# Altium PCB Key_Input.PcbDoc
Units mil, origin at the board's own origin, x right, y up, seen from the top; angles counter-clockwise.
Board outline 3090 x 2000 mil, 2 copper layers (Top Layer, Bottom Layer); 20 components, 24 nets, 77 pads, 0 vias.
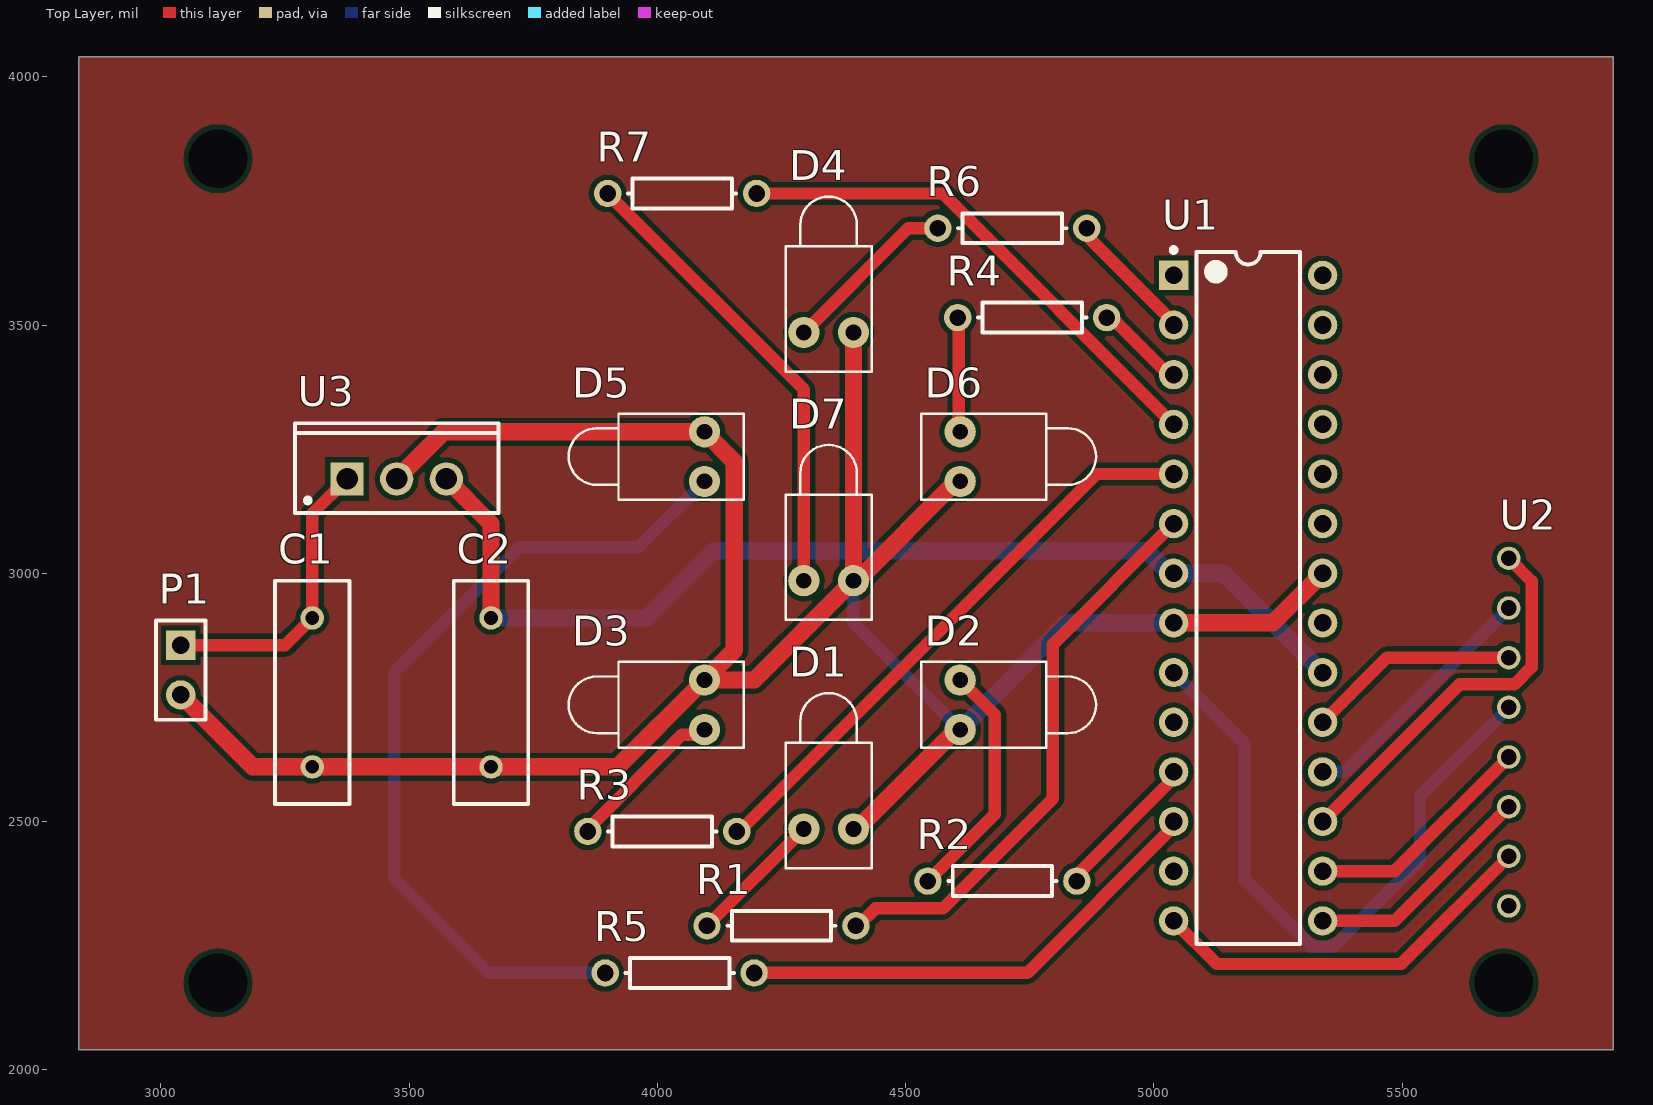
[diagram p0: Top Layer view]
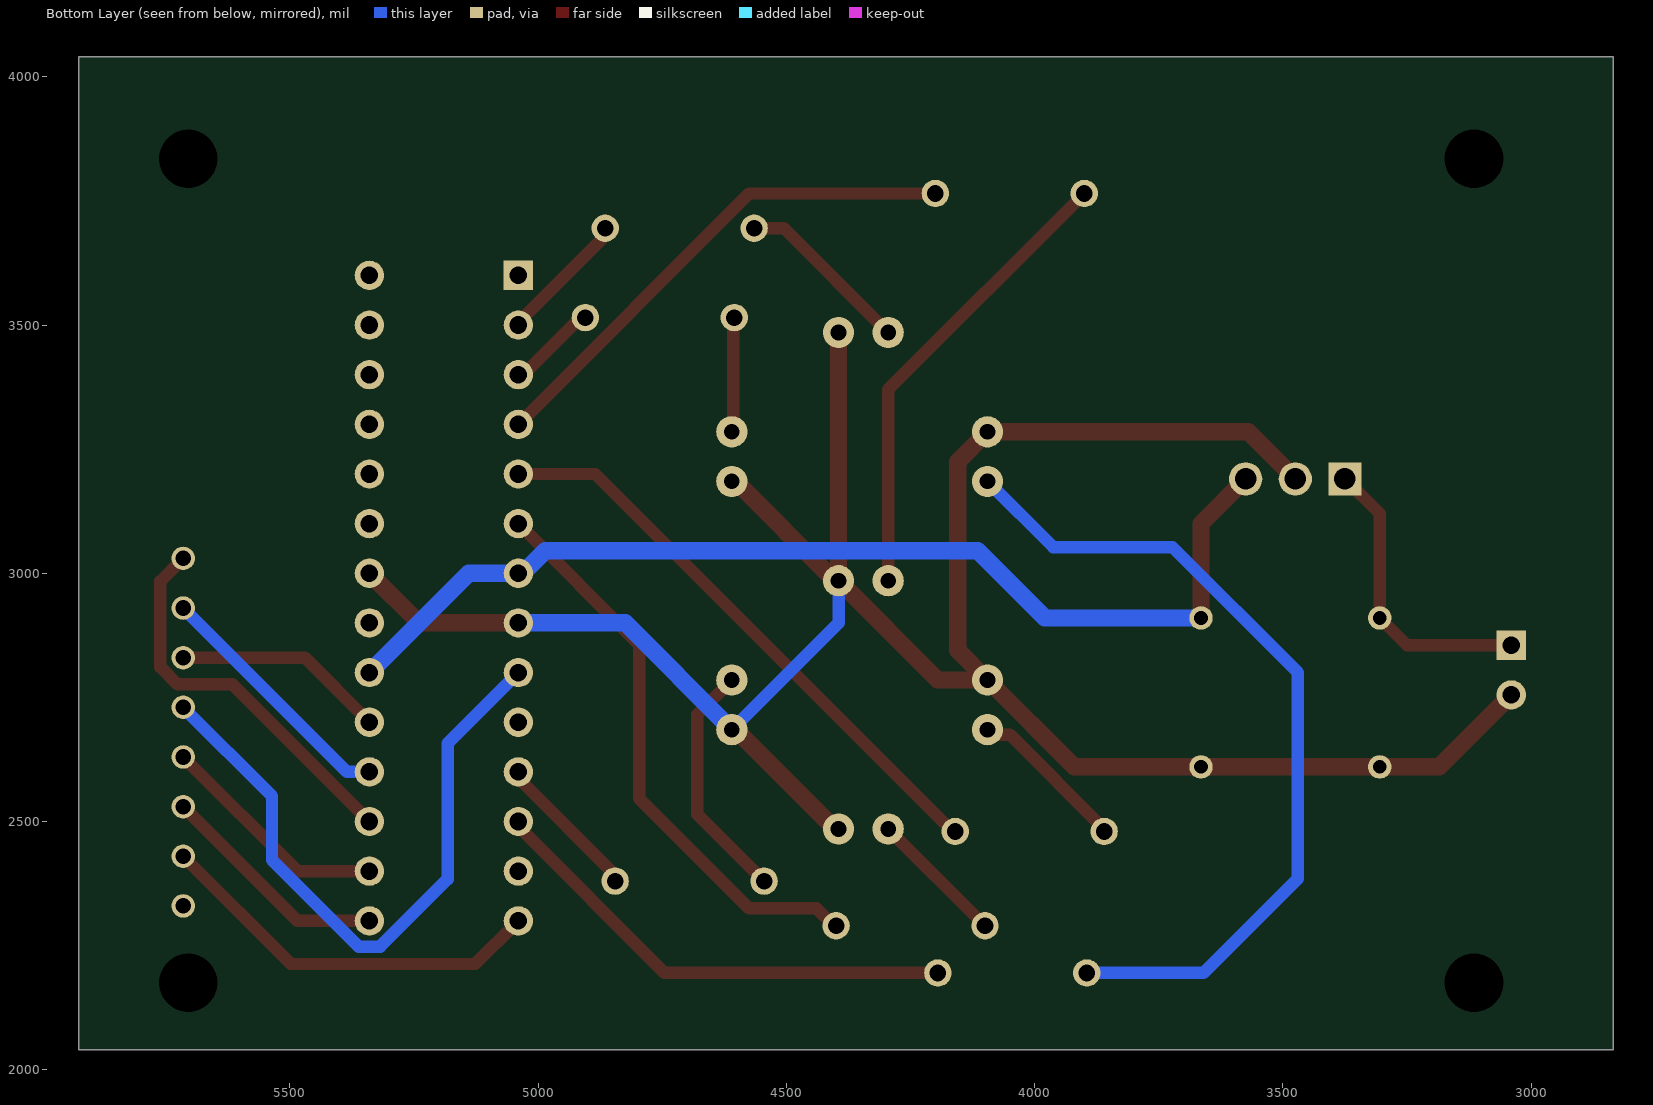
[diagram p1: Bottom Layer view, seen from below]

## Layer stack, top to bottom
Top Solder: solder mask 0.4, Solder Resist, Dk 3.5
Top Layer: signal copper 1.4
Dielectric 1: dielectric 12.6, FR-4, Dk 4.8
Bottom Layer: signal copper 1.4
Bottom Solder: solder mask 0.4, Solder Resist, Dk 3.5

## Board outline
2835,2040 5925,2040 5925,4040 2835,4040

## Design rules (kind name [scope] priority, off if disabled: settings)
AssemblyTestPointUsage [All] p1 off:
AssemblyTestpoint [All] p1 off: testpointundercomponent=TRUE minsize=40 maxsize=100 preferedsize=60 minholesize=0 maxholesize=40 preferedholesize=32 testpointgrid=1 usegrid=TRUE gridtolerance=0.01 allowsidetop=TRUE allowsidebottom=TRUE
Clearance [All] p1: gap=10 ignorepadtopadclearanceinfootprint=FALSE except(0: Arc-Hole Track-Hole SMDPad-Hole THPad-Hole Via-Hole Fill-Hole Poly-Hole Region-Hole Text-Hole)
FabricationTestPointUsage [All] p1 off: valid=0 allowmultiple=FALSE
FabricationTestpoint [All] p1 off: side=3 testpointundercomponent=TRUE minsize=40 maxsize=100 preferedsize=60 minholesize=0 maxholesize=40 preferedholesize=32 testpointgrid=1 allowsidetop=TRUE allowsidebottom=TRUE usegrid=TRUE gridtolerance=0.01
PolygonConnect [All] p1: connectstyle=Relief reliefconductorwidth=10 reliefentries=4 polygonreliefangle="90 Angle" airgapwidth=10
RoutingVias [All] p1: holewidth=28 width=50 viastyle="Through Hole" minholewidth=28 minwidth=50 maxholewidth=28 maxwidth=50
SilkToSolderMaskClearance [IsPad] p1: minsilkscreentomaskgap=2 clearancetoexposedcopper=TRUE
SolderMaskExpansion [All] p1: expansion=4 istentingtop=FALSE
Width Width_1 [InNet('VCC') or InNet('GND')] p1: maxlimit=35 minlimit=10 preferedwidth=15 minimp=50.000000 maximp=50.000000 favimp=50.000000
Width [All] p2: maxlimit=25 minlimit=10 preferedwidth=15 minimp=50.000000 maximp=50.000000 favimp=50.000000
25 further rules are at their usual default settings.

## Components (designator, comment, footprint, x,y, rotation, side; value= is the part's Value field where it differs from the comment)
C1 "Cap" RAD-0.3 3305,2760 r270 top value=330nF
C2 "Cap" RAD-0.3 3665,2760 r270 top value=100nF
D1 "LED1" LED-1 4345,2485 r90 top
D2 "LED1" LED-1 4610,2735 r0 top
D3 "LED1" LED-1 4095,2735 r180 top
D4 "LED1" LED-1 4345,3485 r90 top
D5 "LED1" LED-1 4095,3235 r180 top
D6 "LED1" LED-1 4610,3235 r0 top
D7 "LED1" LED-1 4345,2985 r90 top
P1 "Header 2" HDR1X2 3040,2855 r270 top
R1 "Res1" AXIAL-0.3 4250,2290 r180 top value=220R
R2 "Res1" AXIAL-0.3 4695,2380 r180 top value=220R
R3 "Res1" AXIAL-0.3 4010,2480 r180 top value=220R
R4 "Res1" AXIAL-0.3 4755,3515 r180 top value=220R
R5 "Res1" AXIAL-0.3 4045,2195 r180 top value=220R
R6 "Res1" AXIAL-0.3 4715,3695 r180 top value=220R
R7 "Res1" AXIAL-0.3 4050,3765 r180 top value=220R
U1 "ATmega328P-PU" 28P3 5190,2950 r0 top
U2 "Keypad" PCBComponent_1 5715,2680 r270 top
U3 "L7812CV" TO220 3475,3190 r0 top

## Footprints (in the part's own frame and the unit in brackets; to place one, negate y for a bottom-side part, rotate by r counter-clockwise, add the part's x,y. Pads: shape width x height; smd on the part's side, far side on the other; paste and mask are expansions set on the pad)
28P3 [mm] "28-Pin Plastic Dual In-Line Package (PDIP)"
  rect 1.5x1.5 hole 0.9: 1(-3.81,16.51)
  round 1.5 hole 0.9: 2(-3.81,13.97) 3(-3.81,11.43) 4(-3.81,8.89) 5(-3.81,6.35) 6(-3.81,3.81) 7(-3.81,1.27) 8(-3.81,-1.27) 9(-3.81,-3.81) 10(-3.81,-6.35) 11(-3.81,-8.89) 12(-3.81,-11.43) 13(-3.81,-13.97) 14(-3.81,-16.51) 15(3.81,-16.51) 16(3.81,-13.97) 17(3.81,-11.43) 18(3.81,-8.89) 19(3.81,-6.35) 20(3.81,-3.81) 21(3.81,-1.27) 22(3.81,1.27) 23(3.81,3.81) 24(3.81,6.35) 25(3.81,8.89) 26(3.81,11.43) 27(3.81,13.97) 28(3.81,16.51)
  silkscreen extent -3.93,-17.7 2.65,17.93, body extent -3.6,-17.65 3.6,17.65, height 4.58
AXIAL-0.3 [mm] "Axial Device, Thru-Hole; 2 Leads; 0.3 in Pin Spacing"
  round 1.4 hole 0.85: 1(-3.81,0) 2(3.81,0)
  silkscreen extent -2.77,-0.76 2.77,0.76
HDR1X2 [mm] "Connector; Header; 2 Position"
  rect 1.5x1.5 hole 0.9: 1(0,0)
  round 1.5 hole 0.9: 2(2.54,0)
  silkscreen extent -1.27,-1.27 3.81,1.27
LED-1 [mm] "LED; 2 Leads"
  round 1.6 hole 0.8: 1(0,1.27) 2(0,-1.27)
  silkscreen extent -2,-2.2 6.95,2.2
PCBComponent_1 [mm]
  round 1.2 hole 0.8: C1(1.27,0) C2(3.81,0) C3(6.35,0) C4(8.89,0) R1(-8.89,0) R2(-6.35,0) R3(-3.81,0) R4(-1.27,0)
RAD-0.3 [mm] "Radial Cap, Thru-Hole; 2 Leads; 0.3 in Pin Spacing"
  round 1.2 hole 0.7: 1(-3.81,0) 2(3.81,0)
  silkscreen extent -5.71,-1.91 5.71,1.91
TO220 [mm] "TO, Thru-Hole, Vertical, Heatsink Mounted; 3 In-Line Leads; Pitch 2.54 mm"
  rect 1.7x1.7 hole 1.1: 1(-2.54,0)
  round 1.7 hole 1.1: 2(0,0) 3(2.54,0)
  silkscreen extent -5.2,-1.75 5.2,2.85, body extent -5.25,-1.8 5.25,2.9, height 19.7

## Part data
C1 C2: "Capacitor", LatestRevisionDate=17-Jul-2002, LatestRevisionNote="Re-released for DXP Platform.", PackageDescription="Radial Cap, Thru-Hole; 2 Leads; 0.3 in Pin Spacing", PackageReference=RAD-0.3, Published=8-Jun-2000, Publisher="Altium Limited"
D1 D2 D3 D4 D5 D6 D7: "Typical RED GaAs LED", LatestRevisionDate=08-Jul-2005, LatestRevisionNote="Mech Layer 1 removed.", PackageDescription="LED; 2 Leads", PackageReference=LED-1, Published=8-Jun-2000, Publisher="Altium Limited"
P1: "Header, 2-Pin", LatestRevisionDate=17-Jul-2002, LatestRevisionNote="Re-released for DXP Platform.", Publisher="Altium Limited"
R1 R2 R3 R4 R5 R6 R7: "Resistor", LatestRevisionDate=17-Jul-2002, LatestRevisionNote="Re-released for DXP Platform.", PackageDescription="Axial Device, Thru-Hole; 2 Leads; 0.3 in Pin Spacing", PackageReference=AXIAL-0.3, Published=8-Jun-2000, Publisher="Altium Limited"
U1: library part CMP-0095-00013-2, "8-bit AVR Microcontroller, 32KB Flash, 1KB EEPROM, 2KB SRAM, 28-pin PDIP, Industrial Grade (-40°C to 85°C)", ComponentLink1Description="Manufacturer URL", ComponentLink1URL=http://www.atmel.com/, ComponentLink2Description="ATmega48A/48PA/88A/88PA/168A/168PA/328/328P Datasheet", ComponentLink2URL=http://www.atmel.com/dyn/resources/prod_documents/8271.pdf, ComponentLink3Description="ATmega48A/48PA/88A/88PA/168A/168PA/328/328P Summary", ComponentLink3URL=http://www.atmel.com/dyn/resources/prod_documents/8271S.pdf, DatasheetVersion="revD, May-2011", PackageDescription="28-lead (0.300\"/7.62mm Wide) Plastic Dual Inline Package (PDIP)", PackageReference=28P3, PackageVersion="revB, Sep-2001", RevisionNote="DatasheetVersion updated. URLs added."
U2: library part Component_1
U3: library part CMP-0244-00450-1, "Positive Voltage Regulator, 12V, 3-Pin TO-220", ComponentLink1Description="Manufacturer URL", ComponentLink1URL=http://www.st.com, ComponentLink2Description=Datasheet, ComponentLink2URL=http://www.st.com/internet/com/TECHNICAL_RESOURCES/TECHNICAL_LITERATURE/DATASHEET/CD00000444.pdf, ComponentLink3Description="Package Specification", ComponentLink3URL=http://www.st.com/internet/com/TECHNICAL_RESOURCES/TECHNICAL_LITERATURE/PACKAGE_INFORMATION/CD00004649.pdf, DatasheetVersion=16/11/2011, PackageDescription="TO, Thru-Hole, Vertical, Heatsink Mounted; 3 In-Line Leads; Pitch 2.54 mm", PackageReference=TO220, PackageVersion=ver3.0

## Free pads (board coordinates)
  round 39.37 hole 118.11: 34(3115,2175) 34(3115,3835) 34(5705,2175) 34(5705,3835)

## Nets (pads, with @x,y where several pads share a name; then routed paths per layer and width w, separated by ;. In a path a pad name is that pad's centre, name@x,y a point inside that pad or via, vN(x,y) a via of type N, cw(c..) or ccw(c..) an arc to the next point about the centre after c; other vN are vias at no path point)
GND: C1.2 C2.2 D1.2 D2.2 D3.2 D4.2 D5.2 D6.2 D7.2 P1.2 U1.8 U1.22 U3.2 | length 5124.7
  Top Layer w10: D1.2 D1.2@4402.5,2485 ; D7.2 D7.2@4402.5,2985 ; D2.2@4602.5,2685 D2.2 ; D6.2@4602.5,3185 D6.2
  Top Layer w35: P1.2 3185,2610 C1.2 C2.2 3920,2610 D3.2 ; U3.2 3570,3285 D5.2 4155,3225 4155,2845 D3.2 ; D4.2 D7.2 4195,2785 D3.2 ; D1.2@4402.5,2485 D2.2@4602.5,2685 ; D7.2@4402.5,2985 D6.2@4602.5,3185 ; U1.8 5240,2900 U1.22
  Bottom Layer w25: D7.2 4395,2900 D2.2
  Bottom Layer w35: D2.2 4825,2900 U1.8
NetC1_1: C1.1 P1.1 U3.1 | length 596.8
  Top Layer w25: P1.1 3250,2855 C1.1 3305,3120 U3.1
NetD1_1: D1.1 R1.2 | length 275.8
  Top Layer w25: R1.2 D1.1
NetD2_1: D2.1 R2.2 | length 489.9
  Top Layer w25: R2.2 4680,2515 4680,2715 D2.1
NetD3_1: D3.1 R3.2 | length 322.8
  Top Layer w10: R3.2 R3.2@3860,2485 ; D3.1@4084.86,2674.86 D3.1
  Top Layer w25: R3.2@3860,2485 4049.86,2674.86 D3.1@4084.86,2674.86
NetD4_1: D4.1 R6.2 | length 357
  Top Layer w25: D4.1 4505,3695 R6.2
NetD5_1: D5.1 R5.2 | length 1703.2
  Bottom Layer w25: R5.2 3660,2195 3470,2385 3470,2800 3722.42,3052.42 3962.42,3052.42 D5.1
NetD6_1: D6.1 R4.2 | length 232.1
  Top Layer w10: R4.2 R4.2@4607.5,3512.5 ; D6.1@4607.5,3287.5 D6.1
  Top Layer w25: D6.1@4607.5,3287.5 R4.2@4607.5,3512.5
NetD7_1: D7.1 R7.2 | length 943.6
  Top Layer w25: R7.2 4295,3370 D7.1
NetR1_1: R1.1 U1.6 | length 1157.1
  Top Layer w20: R1.1 R1.1@4404.38,2290
  Top Layer w25: R1.1@4404.38,2290 4439.38,2325 4575,2325 4796.65,2546.65 4796.65,2856.65 U1.6
NetR2_1: R2.1 U1.11 | length 319.4
  Top Layer w10: R2.1@4840,2360 R2.1@4840,2365.31 ; R2.1 R2.1@4845,2392.21 ; U1.11@5030.61,2590.61 U1.11 U1.11@5040,2587.21
  Top Layer w25: R2.1@4845,2392.21 U1.11@5040,2587.21
NetR3_1: R3.1 U1.5 | length 1178.2
  Top Layer w25: R3.1@4165,2480 4885,3200 U1.5
  Bottom Layer w10: R3.1 R3.1@4165,2480
NetR4_1: R4.1 U1.3 | length 182.6
  Top Layer w25: R4.1@4914.5,3515 U1.3@5029.5,3400
  Bottom Layer w20: R4.1 R4.1@4914.5,3515 ; U1.3@5029.5,3400 U1.3
NetR5_1: R5.1 U1.12 | length 977.3
  Top Layer w10: U1.12@5040,2489.81 U1.12
  Top Layer w25: R5.1 4745.19,2195 U1.12@5040,2489.81
NetR6_1: R6.1 U1.2 | length 267.5
  Top Layer w20: R6.1 4871.72,3688.28 R6.1@4871.72,3673.28 ; U1.2 U1.2@5040,3505
  Top Layer w25: R6.1@4871.72,3673.28 U1.2@5040,3505
NetR7_1: R7.1 U1.4 | length 1032.6
  Top Layer w25: R7.1 4575,3765 U1.4
NetU1_9: U1.9 U2.R4 | length 1338.9
  Bottom Layer w25: U1.9 5182.48,2657.52 5182.48,2383.94 5318.45,2247.97 5361.55,2247.97 5536.15,2422.57 5536.15,2551.15 U2.R4
NetU1_14: U1.14 U2.C3 | length 800.9
  Top Layer w25: U1.14 5127.03,2212.97 5497.97,2212.97 U2.C3
NetU1_15: U1.15 U2.C2 | length 470.3
  Top Layer w25: U1.15 5485,2300 U2.C2
NetU1_16: U1.16 U2.C1 | length 470.3
  Top Layer w25: U1.16 5485,2400 U2.C1
NetU1_17: U1.17 U2.R1 | length 788.1
  Top Layer w25: U1.17 5616.12,2776.12 5726.35,2776.12 5761.12,2810.9 5761.12,2983.88 U2.R1
NetU1_18: U1.18 U2.R2 | length 511.7
  Bottom Layer w25: U1.18 5385,2600 U2.R2
NetU1_19: U1.19 U2.R3 | length 428.8
  Top Layer w25: U1.19 5470,2830 U2.R3
VCC: C2.1 U1.7 U1.20 U3.3 | length 2149.7
  Top Layer w35: U3.3 3665,3100 C2.1
  Bottom Layer w35: C2.1 3979.69,2910 4114.69,3045 4985.78,3045 5030.78,3000 5140,3000 U1.20
pads on no net: U1.1 U1.10 U1.13 U1.21 U1.23 U1.24 U1.25 U1.26 U1.27 U1.28 U2.C4

## Polygon pours and split planes (outlines as drawn)
no net on Top Layer "NONET_L01_P002" (solid, pour order 2): 5925,4040 5925,2040 2835,2040 2835,4040